# EAGLE board midimixer-channel-before-rearrangement (EAGLE 7.3.0)
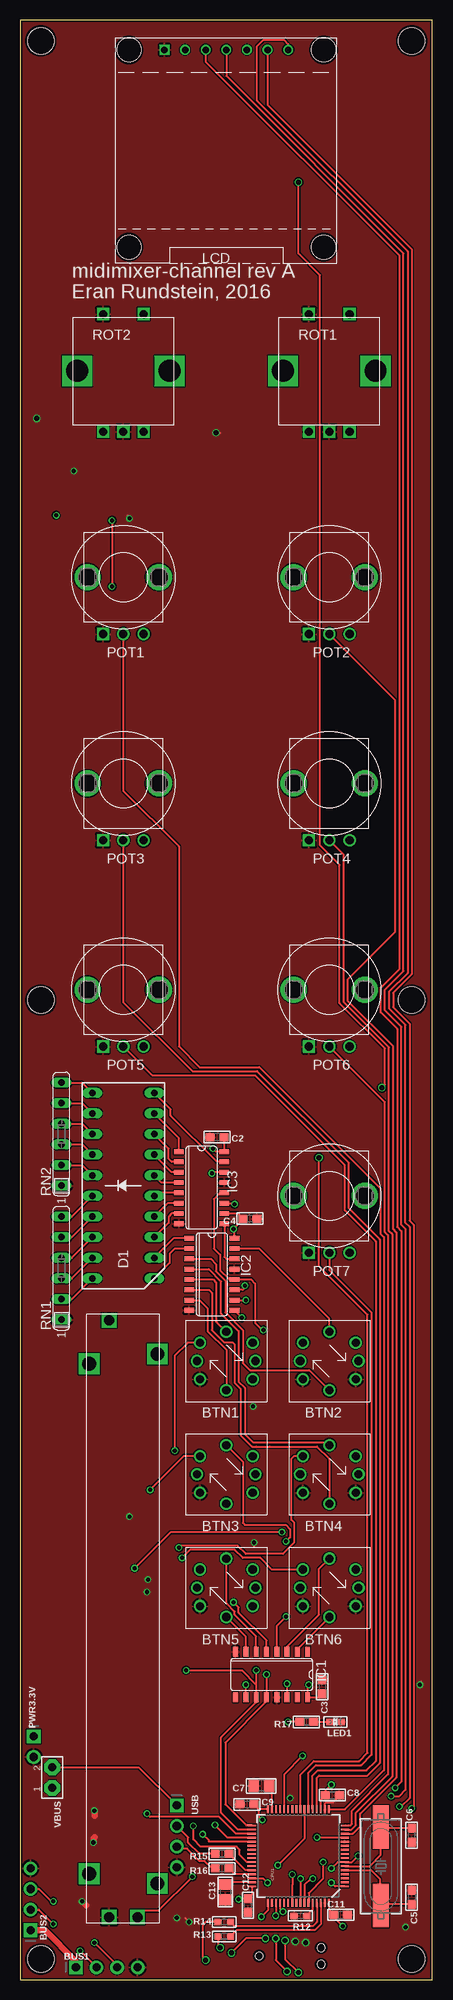
[diagram p0: board, top side]
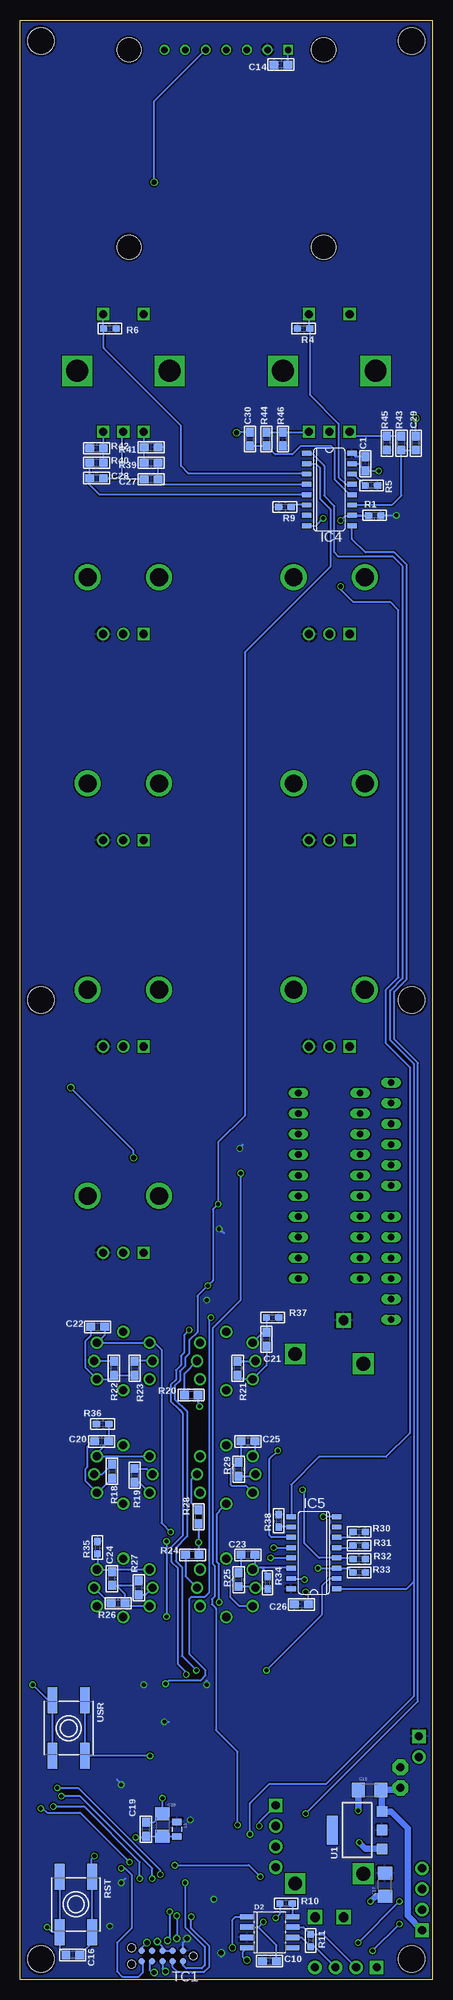
[diagram p1: board, bottom side, seen from below]

Size 50.8 x 241.3 mm. Coordinates in mm from the lower left corner, seen from the top.
Outline: 0,0 50.8,0 50.8,241.3 0,241.3 0,0
Copper layers (1*16): Top 0.035mm / dielectric 1.5mm / Bottom 0.035mm
Design rules "MacroFab_Standard_2_Layer *": minimum track width 6mil, minimum drill 12mil, track to track 6mil, track to pad 6mil, pad to pad 6mil, via to via 6mil, smd to smd 0mil, copper to edge 10mil, drill to drill 10mil, minimum pad ring 6mil, minimum via ring 6mil, stop-mask expansion 2mil, vias tented up to drill 25mil, thermal gap 10mil

## Footprints (pad centres in the part's own frame; a part is rotated, then mirrored left to right if it is on the bottom)
B3W-9000-X2X = drill 1: LED1+ 0,3.6; LED1- 3.6,0; LED2+ 0,-3.6; LED2- -3.6,0; SW1 3.25,-2.25; SW2 -3.25,-2.25; SW3 3.25,2.25; SW4 -3.25,2.25
1X04_ROUND = drill 1 pad 1.676 square: 1 -3.81,0 | drill 1 pad 1.676: 2 -1.27,0; 3 1.27,0; 4 3.81,0
0603 = smd 1.1 x 1: 1 -0.85,0; 2 0.85,0
0805 = smd 1.3 x 1.5: 1 -0.95,0; 2 0.95,0
1206 = smd 1.6 x 1.8: 1 -1.4,0; 2 1.4,0
TQFP64 = smd 0.22 x 1: 1 -3.75,-5.75; 2 -3.25,-5.75; 3 -2.75,-5.75; 4 -2.25,-5.75; 5 -1.75,-5.75; 6 -1.25,-5.75; 7 -0.75,-5.75; 8 -0.25,-5.75; 9 0.25,-5.75; 10 0.75,-5.75; 11 1.25,-5.75; 12 1.75,-5.75; 13 2.25,-5.75; 14 2.75,-5.75; 15 3.25,-5.75; 16 3.75,-5.75; 33 3.75,5.75; 34 3.25,5.75; 35 2.75,5.75; 36 2.25,5.75; 37 1.75,5.75; 38 1.25,5.75; 39 0.75,5.75; 40 0.25,5.75; 41 -0.25,5.75; 42 -0.75,5.75; 43 -1.25,5.75; 44 -1.75,5.75; 45 -2.25,5.75; 46 -2.75,5.75; 47 -3.25,5.75; 48 -3.75,5.75 | smd 1 x 0.22: 17 5.75,-3.75; 18 5.75,-3.25; 19 5.75,-2.75; 20 5.75,-2.25; 21 5.75,-1.75; 22 5.75,-1.25; 23 5.75,-0.75; 24 5.75,-0.25; 25 5.75,0.25; 26 5.75,0.75; 27 5.75,1.25; 28 5.75,1.75; 29 5.75,2.25; 30 5.75,2.75; 31 5.75,3.25; 32 5.75,3.75; 49 -5.75,3.75; 50 -5.75,3.25; 51 -5.75,2.75; 52 -5.75,2.25; 53 -5.75,1.75; 54 -5.75,1.25; 55 -5.75,0.75; 56 -5.75,0.25; 57 -5.75,-0.25; 58 -5.75,-0.75; 59 -5.75,-1.25; 60 -5.75,-1.75; 61 -5.75,-2.25; 62 -5.75,-2.75; 63 -5.75,-3.25; 64 -5.75,-3.75
LED_BARGAPH_10 = drill 0.813 long: 1 -11.43,-3.81; 2 -8.89,-3.81; 3 -6.35,-3.81; 4 -3.81,-3.81; 5 -1.27,-3.81; 6 1.27,-3.81; 7 3.81,-3.81; 8 6.35,-3.81; 9 8.89,-3.81; 10 11.43,-3.81; 11 11.43,3.81; 12 8.89,3.81; 13 6.35,3.81; 14 3.81,3.81; 15 1.27,3.81; 16 -1.27,3.81; 17 -3.81,3.81; 18 -6.35,3.81; 19 -8.89,3.81; 20 -11.43,3.81
SO8 = smd 0.65 x 1.75: 1 -1.905,-2.8; 2 -0.635,-2.8; 3 0.635,-2.8; 4 1.905,-2.8; 5 1.905,2.8; 6 0.635,2.8; 7 -0.635,2.8; 8 -1.905,2.8
PTA6043-2015CPB103 = drill 1.2 square: P1 -36.75,1.75; P2 -36.75,-1.75; P3 36.75,1.75 | drill 1.7 square: P$1 -31.4,4.2; P$2 31.4,4.2; P$3 -32.6,-4.2; P$4 32.6,-4.2
STAND-OFF = hole 3.302: 0,0
SO16 = smd 0.6 x 1.2: 1 -4.445,-2.8; 2 -3.175,-2.8; 3 -1.905,-2.8; 4 -0.635,-2.8; 5 0.635,-2.8; 6 1.905,-2.8; 7 3.175,-2.8; 8 4.445,-2.8; 9 4.445,2.8; 10 3.175,2.8; 11 1.905,2.8; 12 0.635,2.8; 13 -0.635,2.8; 14 -1.905,2.8; 15 -3.175,2.8; 16 -4.445,2.8
0805' = smd 0.8 x 1.2: 1 -0.9,0; 2 0.9,0
SSD1306-7PIN = drill 0.8: CLK -2.54,24.3; CS 7.62,24.3; DC 5.08,24.3; MOSI 0,24.3; RES 2.54,24.3; VCC -5.08,24.3 | drill 0.8 square: GND -7.62,24.3 | hole 3: -12,24.3; 12,24.3; -12,0; 12,0
CHIPLED_0603 = smd 0.8 x 0.8: A 0,-0.75; C 0,0.75
PTV09A-4 = drill 2.2: 4 -4.4,0; 5 4.4,0 | drill 1 square: CCW -2.5,-7 | drill 1: CENTER 0,-7; CW 2.5,-7
1X02_ROUND = drill 1 pad 1.676 square: 1 -1.27,0 | drill 1 pad 1.676: 2 1.27,0
_0603 = smd 0.9 x 0.8: 1 -0.762,0; 2 0.762,0
SIL6 = drill 0.813 long: 1 -6.35,0; 2 -3.81,0; 3 -1.27,0; 4 1.27,0; 5 3.81,0; 6 6.35,0
PEC111-4XXXK-SXXXX = drill 1 square: A -2.5,-7.5; B 2.5,-7.5; C 0,-7.5; S1 -2.5,7; S2 2.5,7 | drill 2.7 square: P$1 -5.7,0; P$2 5.7,0
EVQ-Q2 = smd 3.2 x 1.2: A -3.4,-2; A' 3.4,-2; B -3.4,2; B' 3.4,2
TC2050-IDC-NL = smd 0.787 x 0.787: 1 -2.54,-0.635; 2 -2.54,0.635; 3 -1.27,-0.635; 4 -1.27,0.635; 5 0,-0.635; 6 0,0.635; 7 1.27,-0.635; 8 1.27,0.635; 9 2.54,-0.635; 10 2.54,0.635 | hole 0.991: -3.81,0; 3.81,1.016; 3.81,-1.016
SOT223-R = smd 1.3 x 1.3: 1 -2.3,-3.05; 2 0,-3.05; 3 2.3,-3.05 | smd 3.6 x 1.3: 4 0,3.05
JUMPER2 = drill 1 pad 1.93 octagon: 1 2.54,0; 2 0,0
HC49UP = smd 5.334 x 1.93: 1 -4.826,0; 2 4.826,0

## Placement (x,y rotation side)
BTN1  B3W-9000-RG2N  [B3W-9000-X2X]  25.4,76.2 0 top
BTN2  B3W-9000-RG2N  [B3W-9000-X2X]  38.1,76.2 0 top
BTN3  B3W-9000-RG2N  [B3W-9000-X2X]  25.4,62.23 0 top
BTN4  B3W-9000-RG2N  [B3W-9000-X2X]  38.1,62.23 0 top
BTN5  B3W-9000-RG2N  [B3W-9000-X2X]  25.4,48.26 0 top
BTN6  B3W-9000-RG2N  [B3W-9000-X2X]  38.1,48.26 0 top
BUS1  [1X04_ROUND]  10.67,1.52 0 top
BUS2  [1X04_ROUND]  1.27,9.91 90 top
C1  0.1uF  [0603]  8.26,186.69 90 bottom
C2  0.1uF  [0603]  24.26,103.76 180 top
C3  0.1uF  [0603]  37.21,36.07 270 top
C4  0.1uF  [0603]  28.32,93.73 180 top
C5  18pf  [0603]  48.26,10.16 270 top
C6  18pf  [0603]  48.26,17.78 90 top
C7  2.2uF 810-CGJ4J2X7R1A225K  [0805]  29.72,23.88 180 top
C8  0.1uF  [0603]  38.48,22.73 0 top
C9  0.1uF  [0603]  27.94,21.59 0 top
C10  0.1uF  [0603]  20.07,2.29 0 bottom
C11  0.1uF  [0603]  39.5,8 0 top
C12  0.1uF  [0603]  28.07,9.14 90 top
C13  2.2uF 810-CGJ4J2X7R1A225K  [0805]  25.27,10.79 270 top
C14  0.1uF  [0603]  18.67,235.84 180 bottom
C15  10uF 603-CC206KKX5R7BB106  [1206]  7.75,23.37 0 bottom
C16  0.1uF  [0603]  44.32,3.05 180 bottom
C17  10uF 603-CC206KKX5R7BB106  [1206]  5.84,11.68 90 bottom
C18  10uF 603-CC206KKX5R7BB106  [1206]  33.27,19.05 270 bottom
C19  0.1uF  [0603]  35.31,18.54 90 bottom
C20  0.1uF  [0603]  40.77,66.29 0 bottom
C21  0.1uF  [0603]  20.45,78.87 90 bottom
C22  0.1uF  [0603]  41.27,80.39 0 bottom
C23  0.1uF  [0603]  22.73,52.32 0 bottom
C24  0.1uF  [0603]  39.5,49.4 90 bottom
C25  0.1uF  [0603]  22.73,66.29 0 bottom
C26  0.1uF  [0603]  16.13,46.23 180 bottom
C27  0.01uF  [0603]  34.67,184.78 180 bottom
C28  0.01uF  [0603]  41.4,184.91 0 bottom
C29  0.01uF  [0603]  2.03,189.23 90 bottom
C30  0.01uF  [0603]  22.48,189.74 90 bottom
CPU1  STM32F405RG  [TQFP64]  34.29,15.24 90 top
D1  DC7G3HWA  [LED_BARGAPH_10]  12.7,97.79 90 top
D2  SN65HVD232  [SO8]  20.07,5.84 270 bottom
FADER1  PTA6043-2015CPB103  [PTA6043-2015CPB103]  12.7,44.45 90 top
H1  STAND-OFF  [STAND-OFF]  48.26,2.54 0 top
H2  STAND-OFF  [STAND-OFF]  2.54,238.76 0 top
H3  STAND-OFF  [STAND-OFF]  2.54,2.54 0 top
H4  STAND-OFF  [STAND-OFF]  48.26,238.76 0 top
H5  STAND-OFF  [STAND-OFF]  2.54,120.65 0 top
H6  STAND-OFF  [STAND-OFF]  48.26,120.65 0 top
IC1  74LS595D  [SO16]  30.99,37.59 180 top
IC2  74LS595D  [SO16]  23.62,86.87 270 top
IC3  74LS595D  [SO16]  22.35,97.54 270 top
IC4  74165D  [SO16]  12.7,183.51 270 bottom
IC5  74165D  [SO16]  14.61,52.58 90 bottom
L1  [0805']  31.5,18.54 270 bottom
LCD  SSD1306-7PIN  [SSD1306-7PIN]  25.4,213.36 0 top
LED1  [CHIPLED_0603]  38.86,31.75 270 top
POT1  [PTV09A-4]  12.7,172.72 0 top
POT2  [PTV09A-4]  38.1,172.72 0 top
POT3  [PTV09A-4]  12.7,147.32 0 top
POT4  [PTV09A-4]  38.1,147.32 0 top
POT5  [PTV09A-4]  12.7,121.92 0 top
POT6  [PTV09A-4]  38.1,121.92 0 top
POT7  [PTV09A-4]  38.1,96.52 0 top
PWR3.3V  [1X02_ROUND]  1.65,28.7 270 top
R1  10k  [_0603]  7.11,180.34 0 bottom
R4  10k  [_0603]  15.88,203.33 180 bottom
R5  10k  [_0603]  7.49,184.02 0 bottom
R6  10k  [_0603]  39.75,203.33 0 bottom
R9  10k  [_0603]  18.16,181.36 180 bottom
R10  0  [_0603]  18.03,9.4 180 bottom
R11  120 DNP  [_0603]  14.99,4.83 270 bottom
R12  10k  [_0603]  34.54,7.87 180 top
R13  0  [_0603]  25.15,5.33 0 top
R14  0  [_0603]  25.15,7.11 0 top
R15  22  [0603]  24.89,15.49 180 top
R16  22  [0603]  24.89,13.72 180 top
R17  330  [0603]  35.31,31.75 180 top
R18  330  [0603]  39.5,62.61 270 bottom
R19  330  [0603]  36.7,62.1 270 bottom
R20  330  [0603]  29.72,72.01 0 bottom
R21  330  [0603]  24,75.31 270 bottom
R22  330  [0603]  39.24,75.31 270 bottom
R23  330  [0603]  36.7,75.31 270 bottom
R24  330  [0603]  29.59,52.32 0 bottom
R25  330  [0603]  23.88,49.28 90 bottom
R26  330  [0603]  38.73,46.35 0 bottom
R27  330  [0603]  36.2,48.26 90 bottom
R28  330  [0603]  28.83,57.02 270 bottom
R29  330  [0603]  23.88,62.87 90 bottom
R30  10k  [_0603]  9.02,55.12 0 bottom
R31  10k  [_0603]  9.02,53.47 0 bottom
R32  10k  [_0603]  9.02,51.82 0 bottom
R33  10k  [_0603]  9.02,50.16 0 bottom
R34  10k  [_0603]  20.32,48.9 270 bottom
R35  10k  [_0603]  41.27,53.21 90 bottom
R36  10k  [_0603]  40.64,68.45 180 bottom
R37  10k  [_0603]  19.68,81.53 0 bottom
R38  10k  [_0603]  18.92,56.52 90 bottom
R39  10K  [0603]  34.67,186.82 180 bottom
R40  10K  [0603]  41.4,186.82 0 bottom
R41  10K  [0603]  34.67,188.72 180 bottom
R42  10K  [0603]  41.4,188.59 0 bottom
R43  10K  [0603]  3.81,189.23 90 bottom
R44  10K  [0603]  20.45,189.74 90 bottom
R45  10K  [0603]  5.59,189.23 90 bottom
R46  10K  [0603]  18.41,189.74 90 bottom
RN1  4606X-101-101LF  [SIL6]  5.08,87.63 90 top
RN2  4606X-101-101LF  [SIL6]  5.08,104.14 90 top
ROT1  PEC12R-4225F-S0024  [PEC111-4XXXK-SXXXX]  38.1,198.12 0 top
ROT2  PEC12R-4225F-S0024  [PEC111-4XXXK-SXXXX]  12.7,198.12 0 top
RST  [EVQ-Q2]  43.94,9.27 270 bottom
TC1  TC2050-IDC-NL  [TC2050-IDC-NL]  33.27,2.92 180 bottom
U1  LM1117IMPX-3.3/NOPB  [SOT223-R]  9.27,18.41 90 bottom
USB  [1X04_ROUND]  19.3,17.65 270 top
USR  [EVQ-Q2]  44.83,30.99 270 bottom
VBUS  [JUMPER2]  3.94,26.16 270 top
Y1  8MHz 695-HCM49-8-U  [HC49UP]  44.45,13.97 270 top

## Library data of the parts
BTN1-BTN6 FADER1 LCD POT1-POT7 ROT1 ROT2 = keves
BUS1 BUS2 C1-C14 C16 C19-C30 LED1 PWR3.3V R1 R4-R6 R9-R46 RST U1 USB USR VBUS Y1 = microbuilder
C15 C17 C18 L1 = SparkFun-Passives
CPU1 IC4 IC5 = SparkFun-DigitalIC
D1 = SparkFun-LED
D2 = omc
H1-H6 = SparkFun-Electromechanical
IC1-IC3 = SparkFun-DigitalIC; PROD_ID: IC-07875
RN1 RN2 = resistor-sil; OC_FARNELL: unknown; OC_NEWARK: unknown
TC1 = TagConnect

## Nets
3.3V: C1.2 C2.1 C3.2 C4.2 C8.1 C9.2 C10.1 C11.1 C12.2 C14.2 C17.2 C26.2 CPU1.1 CPU1.19 CPU1.32 CPU1.48 CPU1.64 D2.3 FADER1.P3 IC1.10 IC1.16 IC2.10 IC2.16 IC3.10 IC3.16 IC4.16 IC5.16 L1.1 LCD.VCC POT1.CW POT2.CW POT3.CW POT4.CW POT5.CW POT6.CW POT7.CW PWR3.3V.1 R1.2 R4.2 R5.2 R6.2 R9.2 R17.2 R30.2 R31.2 R32.2 R33.2 R34.2 R35.2 R36.2 R37.2 R38.2 R41.1 R42.1 R45.1 R46.1 TC1.1 U1.2
5.0V: BUS1.1 BUS2.1 C15.2 U1.3 VBUS.1
ADC0: CPU1.14 POT2.CENTER
ADC1: CPU1.15 POT4.CENTER
ADC2: CPU1.16 POT6.CENTER
ADC3: CPU1.17 POT1.CENTER
ADC4: CPU1.20 POT3.CENTER
ADC5: CPU1.21 POT5.CENTER
ADC6: CPU1.22 POT7.CENTER
ADC7: CPU1.23 FADER1.P2
AVDD: C18.2 C19.1 CPU1.13 L1.2
BTN_LED1: BTN2.LED1+ IC2.15
BTN_LED2: BTN2.LED2+ IC2.3
BTN_LED3: BTN1.LED1+ IC2.5
BTN_LED4: BTN1.LED2+ IC2.7
BTN_LED5: BTN4.LED1+ IC2.4
BTN_LED6: BTN6.LED1+ IC1.3
BTN_LED7: BTN5.LED1+ IC1.6
BTN_LED8: BTN5.LED2+ IC1.7
BTN_LED9: BTN4.LED2+ IC2.6
BTN_LED10: BTN6.LED2+ IC1.2
BTN_LED11: BTN3.LED1+ IC1.4
BTN_LED12: BTN3.LED2+ IC1.5
BTN_UNUSED1: IC1.1
BTN_UUSED2: IC1.15
CAN_H: BUS1.2 BUS2.2 D2.7 R11.1
CAN_L: BUS1.3 BUS2.3 D2.6 R11.2
CAN_RX: D2.4 R14.1
CAN_TX: D2.1 R13.1
DIN_1: C29.1 IC4.11 R43.1
DIN_2: C30.1 IC4.12 R44.1
DIN_3: IC4.13 R4.1 ROT2.S2
DIN_4: IC4.14 R5.1
DIN_5: IC4.3 R6.1 ROT1.S2
DIN_6: C27.1 IC4.4 R39.1
DIN_7: C28.1 IC4.5 R40.1
DIN_8: IC4.6 R9.1
DIN_9: BTN1.SW4 C21.2 IC5.11 R37.1
DIN_10: BTN4.SW3 BTN4.SW4 C20.2 IC5.12 R36.1
DIN_11: BTN6.SW3 BTN6.SW4 C24.2 IC5.13 R35.1
DIN_12: BTN5.SW4 C23.2 IC5.14 R34.1
DIN_13: BTN2.SW3 BTN2.SW4 C22.2 IC5.3 R33.1
DIN_14: BTN3.SW4 C25.2 IC5.4 R32.1
DIN_15: IC5.5 R31.1
DIN_16: IC5.6 R30.1
GND: BTN1.SW2 BTN2.SW1 BTN2.SW2 BTN3.SW2 BTN4.SW1 BTN4.SW2 BTN5.SW2 BTN6.SW1 BTN6.SW2 BUS1.4 BUS2.4 C1.1 C2.2 C3.1 C4.1 C5.1 C6.1 C7.2 C8.2 C9.1 C10.2 C11.2 C12.1 C13.2 C14.1 C15.1 C16.2 C17.1 C18.1 C19.2 C20.1 C21.1 C22.1 C23.1 C24.1 C25.1 C26.1 C27.2 C28.2 C29.2 C30.2 CPU1.12 CPU1.18 CPU1.63 D2.2 FADER1.P1 IC1.8 IC1.13 IC2.8 IC2.13 IC3.8 IC3.13 IC4.8 IC4.15 IC5.8 IC5.15 LCD.GND LED1.C POT1.CCW POT2.CCW POT3.CCW POT4.CCW POT5.CCW POT6.CCW POT7.CCW PWR3.3V.2 R10.2 R12.2 R18.2 R19.2 R20.2 R21.2 R22.2 R23.2 R24.2 R25.2 R26.2 R27.2 R28.2 R29.2 RN1.1 RN2.1 ROT1.C ROT1.S1 ROT2.C ROT2.S1 RST.A RST.A' TC1.3 TC1.5 TC1.9 U1.1 USB.4 USR.A USR.A'
LCD_CLK: CPU1.55 LCD.CLK
LCD_CS: CPU1.58 LCD.CS
LCD_DC: CPU1.59 LCD.DC
LCD_MISO_UNUSED: CPU1.56
LCD_MOSI: CPU1.57 LCD.MOSI
LCD_RST: CPU1.24 LCD.RES
N$1: C6.2 CPU1.6 Y1.1
N$2: C5.2 CPU1.5 Y1.2
N$3: C13.1 CPU1.47
N$4: C7.1 CPU1.31
N$5: LED1.A R17.1
N$6: CPU1.60 R12.1
N$7: R15.2 USB.2
N$8: R16.2 USB.3
N$9: BTN4.LED1- R18.1
N$10: BTN4.LED2- R19.1
N$11: D1.2 IC2.1
N$12: IC1.14 IC2.9
N$13: CPU1.62 R13.2
N$14: D1.20 RN1.2
N$15: D1.19 RN1.3
N$16: D1.18 RN1.4
N$17: D1.17 RN1.5
N$18: D1.16 RN1.6
N$19: D1.15 RN2.2
N$20: D1.14 RN2.3
N$21: D1.13 RN2.4
N$22: D1.12 RN2.5
N$23: D1.11 RN2.6
N$24: BTN1.LED1- R20.1
N$25: BTN1.LED2- R21.1
N$26: IC5.10 R38.1
N$27: CPU1.61 R14.2
N$28: IC4.10 IC5.9 R1.1
N$29: BTN5.LED1- R24.1
N$30: BTN5.LED2- R25.1
N$31: D1.1 IC2.2
N$32: R40.2 R42.2 ROT1.B
N$33: R39.2 R41.2 ROT1.A
N$34: BTN6.LED1- R26.1
N$35: BTN6.LED2- R27.1
N$36: R44.2 R46.2 ROT2.B
N$37: R43.2 R45.2 ROT2.A
N$39: BTN2.LED1- R22.1
N$40: BTN2.LED2- R23.1
N$44: BTN3.LED1- R28.1
N$45: BTN3.LED2- R29.1
N$49: D1.10 IC3.15
N$50: D1.9 IC3.1
N$51: D1.8 IC3.2
N$52: D1.7 IC3.3
N$53: D1.6 IC3.4
N$54: D1.5 IC3.5
N$55: D1.4 IC3.6
N$56: D1.3 IC3.7
N$57: IC2.14 IC3.9
N$73: D2.8 R10.1
NRST: C16.1 CPU1.7 RST.B RST.B' TC1.10
PB2: CPU1.28 USR.B USR.B'
SPI2_CLK: CPU1.34 IC1.11 IC2.11 IC3.11 IC4.2 IC5.2
SPI2_MISO: CPU1.35 IC4.9
SPI2_MOSI: CPU1.36 IC3.14
SPI2_RC1: CPU1.33 IC1.12 IC2.12 IC3.12
SPI2_RC2: CPU1.37 IC4.1 IC5.1
SWCK: CPU1.49 TC1.4
SWDIO: CPU1.46 TC1.2
UART_RX: CPU1.52 TC1.8
UART_TX: CPU1.51 TC1.6
USB_DM: CPU1.44 R15.1
USB_DP: CPU1.45 R16.1
USB_VBUS: CPU1.42 USB.1 VBUS.2

## Tracks (layer width: path | path; a pad name or v marks a point on that pad's centre or on a via)
3.3V  (via drill 0.51, 0.6)
  Top 0.254: C2.1 25.15,103.71 IC3.16 24.13,101.98 v23.75,102.36 | C3.2 36.78,34.79 IC1.16 35.43,36.2 v35.56,36.32 | IC1.10 v27.81,36.32 | IC3.10 26.84,94.36 C4.2 27.47,93.64 v26.29,92.46 26.42,92.32 IC2.16 | IC2.10 v27.81,83.69 | CPU1.19 37.04,22.14 C8.1 37.63,23.28 v38.35,24 | CPU1.32 29.39,20.99 | 29.39,20.99 C9.2 | 29.39,20.99 29.39,20.14 v29.84,19.68 | v26.92,9.91 27.01,9.99 C12.2 28.54,10.47 CPU1.48 | CPU1.64 38.04,8.61 C11.1 38.65,7.71 v39.75,6.6 | CPU1.1 38.8,11.49 v38.35,11.94 | R17.2 v33.02,31.75 | v30.23,5.08 27.81,5.08 v26.04,3.3
  Bottom 0.254: v26.29,92.46 26.29,92.33 26.16,92.2 25.91,92.2 25.65,91.95 | v23.75,102.36 23.75,102.49 23.37,102.87 | v35.56,36.32 35.81,36.58 | v27.81,36.32 27.81,36.83 | v27.81,83.69 27.94,83.69 | C1.2 9.48,187.54 IC4.16 | R1.2 v4.45,180.34 | v38.35,24 38.35,24.13 38.86,24.64 | v29.84,19.68 30.1,19.43 | v26.92,9.91 26.8,9.91 26.67,9.78 | v38.35,11.94 37.85,12.45 | v33.02,31.75 32.51,31.75 | TC1.1 30.73,4.57 v30.23,5.08 | v26.04,3.3 26.04,2.79
  pour Bottom: -6.86,241.3 -6.86,-0.89 49.91,-1.14 54.99,8.89 54.86,242.7
5.0V
  Top 0.813: BUS2.1 3.05,6.1 6.86,2.29 BUS1.1
  Bottom 0.813: BUS2.1 3.05,7.87 3.05,18.67 5.08,20.7 6.21,20.7 U1.3 6.22,23.24 C15.2 4.19,23.37 VBUS.1
ADC0
  Top 0.254: CPU1.14 40.98,17.99 41.91,18.92 41.91,20.45 46.35,24.89 46.35,92.08 45.97,92.46 45.97,114.94 40.39,120.52 40.39,123.19 46.23,129.03 46.23,157.59 POT2.CENTER
ADC1
  Top 0.254: CPU1.15 40.84,18.49 41.4,19.05 41.4,20.57 45.85,25.02 45.85,91.82 45.47,92.2 45.47,114.81 39.88,120.4 39.88,138.54 POT4.CENTER
ADC2
  Top 0.254: CPU1.16 40.71,18.99 40.89,19.18 40.89,20.83 45.34,25.27 45.34,91.69 44.96,92.08 44.96,108.06 POT6.CENTER
ADC3
  Top 0.254: CPU1.17 40.04,20.99 44.83,25.78 44.83,91.44 44.45,91.82 44.45,97.41 29.46,112.39 22.1,112.39 19.56,114.94 19.56,139.57 12.7,146.43 POT1.CENTER
ADC4
  Top 0.254: CPU1.20 36.54,24.86 36.83,25.15 42.8,25.15 44.32,26.67 44.32,91.19 40.51,95 40.51,100.58 29.21,111.89 21.21,111.89 12.7,120.4 POT3.CENTER
ADC5
  Top 0.254: CPU1.21 36.04,25.12 36.7,25.78 42.67,25.78 43.81,26.92 43.81,90.93 40.01,94.74 40.01,100.33 28.96,111.38 16.26,111.38 12.71,114.92 POT5.CENTER
ADC6
  Top 0.254: CPU1.22 35.54,25.51 36.45,26.42 42.04,26.42 43.31,27.69 43.31,82.17 38.1,87.38 POT7.CENTER
ADC7  (via drill 0.51)
  Top 0.254: CPU1.23 35.04,17.39 v31.75,14.1 | v21.21,12.7 17.02,8.51 15.26,8.51 FADER1.P2
  Bottom 0.254: v31.75,14.1 22.61,14.1 v21.21,12.7
AVDD  (via drill 0.51)
  Top 0.254: CPU1.13 36.61,17.49 v36.58,17.53
  Bottom 0.254: v36.58,17.53 35.47,17.53 C19.1 33.32,17.69 C18.2 L1.2
BTN_LED1
  Top 0.254: BTN2.LED1+ 38.1,81.41 29.46,90.04 IC2.15
BTN_LED2
  Top 0.254: BTN2.LED2+ 35.64,75.06 28.32,75.06 27.43,75.95 27.43,80.01 25.27,82.17 25.27,86.11 24.13,87.25 24.13,88.14 23.5,88.77 IC2.3
BTN_LED3
  Top 0.254: IC2.5 23.75,86.23 24.13,85.85 24.13,81.07 24.28,80.92 BTN1.LED1+
BTN_LED4
  Top 0.254: IC2.7 22.1,83.69 23.11,82.68 23.11,79.88 25.4,77.6 BTN1.LED2+
BTN_LED5
  Top 0.254: BTN4.LED1+ 37.76,66.17 28.7,66.17 27.69,67.18 27.69,72.9 26.92,73.66 26.92,79.88 24.77,82.04 24.77,85.98 23.24,87.5 IC2.4
BTN_LED6
  Top 0.254: IC1.3 32.89,41.02 36.83,44.96 36.83,50.59 BTN6.LED1+
BTN_LED7
  Top 0.254: IC1.6 29.08,42.29 26.42,44.96 26.42,45.34 25.4,46.35 BTN5.LED1+
BTN_LED8
  Top 0.254: IC1.7 27.81,42.25 BTN5.LED2+
BTN_LED9
  Top 0.254: IC2.6 23.24,84.96 23.62,84.58 23.62,80.01 25.15,78.49 26.16,78.49 26.42,78.23 26.42,73.53 27.18,72.77 27.18,67.06 28.57,65.66 29.08,65.66 30.73,65.66 36.58,65.66 38.1,64.14 BTN4.LED2+
BTN_LED10
  Top 0.254: IC1.2 34.16,40.72 BTN6.LED2+
BTN_LED11  (via drill 0.51)
  Top 0.254: BTN3.LED1+ 27.43,63.8 27.43,56.26 27.69,56.01 32.77,56.01 33.27,55.5 33.27,54.48 v32.77,53.98 | IC1.4 31.62,43.56 v32.77,44.7
  Bottom 0.254: v32.77,53.98 v32.77,44.7
BTN_LED12  (via drill 0.51)
  Top 0.254: IC1.5 30.35,41.78 26.92,45.21 26.92,45.85 v26.29,46.48
  Bottom 0.254: BTN3.LED2+ 26.29,57.74 26.29,57.66 26.54,57.4 26.54,51.44 26.29,51.18 v26.29,46.48
CAN_H  (via drill 0.51)
  Top 0.254: BUS2.2 2.29,8.64 v4.06,6.86 | BUS1.2 v7.37,3.56
  Bottom 0.254: D2.7 15.88,6.48 R11.1 13.46,5.59 BUS1.2 | v7.37,3.56 v4.06,6.86
CAN_L  (via drill 0.51)
  Top 0.254: BUS2.3 2.29,11.18 3.81,9.65 v4.06,9.65 | BUS1.3 11.94,1.78 v9.14,4.57
  Bottom 0.254: D2.6 16.13,5.21 R11.2 14.48,4.06 BUS1.3 | v9.14,4.57 v4.06,9.65
CAN_RX  (via drill 0.6)
  Top 0.254: R14.1 22.86,7.11 22.48,6.73 22.48,2.79 v22.86,2.41
  Bottom 0.254: v22.86,2.41 22.99,2.41 23.37,2.79 23.37,3.44 D2.4
CAN_TX  (via drill 0.6)
  Top 0.254: R13.1 24.38,4.19 v24.64,3.94
  Bottom 0.254: v24.64,3.94 24.64,7.37 24.26,7.75 D2.1
DIN_1
  Bottom 0.254: IC4.11 4.95,181.61 3.81,182.75 R43.1 C29.1
DIN_2
  Bottom 0.254: IC4.12 10.16,182.88 12.06,184.78 12.06,188.47 12.45,188.85 16.26,188.85 17.27,187.83 19.39,187.83 R44.1 C30.1
DIN_3
  Bottom 0.254: IC4.13 10.67,184.15 11.56,185.04 11.56,191.64 15.11,195.2 R4.1 15.2,203.41 ROT2.S2
DIN_4
  Bottom 0.254: IC4.14 9.65,185.42 R5.1
DIN_5
  Bottom 0.254: IC4.3 15.63,185.55 30.1,185.55 30.99,186.44 30.99,191.39 40.51,200.91 R6.1 40.55,203.37 40.6,203.37 ROT1.S2
DIN_6
  Bottom 0.254: IC4.4 33.19,184.15 C27.1 R39.1
DIN_7
  Bottom 0.254: IC4.5 41.02,182.88 42.29,184.15 42.29,184.87 C28.1 R40.1
DIN_8
  Bottom 0.254: IC4.6 17.14,181.61 R9.1
DIN_9  (via drill 0.51)
  Top 0.254: BTN1.SW4 20.66,78.45 19.05,76.83 v19.05,65.15
  Bottom 0.254: BTN1.SW4 20.88,79.72 C21.2 R37.1 | IC5.11 19.81,54.48 20.07,54.74 20.07,64.14 v19.05,65.15
DIN_10  (via drill 0.51)
  Top 0.254: BTN4.SW4 33.75,64.48 33.4,64.14 33.4,56.64 33.78,56.26 33.78,53.85 32.38,52.45 27.81,52.45 26.8,53.47 19.81,53.47 v19.56,53.21
  Bottom 0.254: BTN4.SW4 BTN4.SW3 41.35,64.86 C20.2 39.88,66.33 R36.1 | v19.56,53.21 IC5.12
DIN_11  (via drill 0.51)
  Top 0.254: BTN6.SW4 31.02,50.51 29.59,51.94 27.43,51.94 26.42,52.96 20.95,52.96 v19.94,51.94
  Bottom 0.254: BTN6.SW4 39.24,50.51 C24.2 39.75,50.51 BTN6.SW3 41.27,50.59 R35.1 | v19.94,51.94 IC5.13
DIN_12
  Bottom 0.254: C23.2 21.88,50.78 | 21.88,50.78 BTN5.SW4 | 21.88,50.78 21.08,50.78 | 21.08,50.78 17.51,50.78 IC5.14 | R34.1 20.32,50.02 21.08,50.78
DIN_13  (via drill 0.51)
  Top 0.254: v32.26,55.12 18.54,55.12 v14.1,50.67
  Bottom 0.254: C22.2 40.42,79.38 BTN2.SW3 BTN2.SW4 34.25,78.45 33.4,77.6 33.4,56.26 v32.26,55.12 | v14.1,50.67 IC5.3 10.29,50.67 R33.1
DIN_14  (via drill 0.51)
  Top 0.254: v16,60.33 20.19,64.52 22.11,64.52 BTN3.SW4
  Bottom 0.254: C25.2 21.88,64.75 BTN3.SW4 | v16,60.33 15.75,60.07 15.75,53.72 13.97,51.94 IC5.4 9.91,51.94 R32.1
DIN_15
  Bottom 0.254: IC5.5 10.03,53.21 R31.1
DIN_16
  Bottom 0.254: IC5.6 10.41,54.48 R30.1
GND  (via drill 0.51, 0.6)
  Top 0.254: v28.7,70.61 28.57,70.61 28.45,70.48 | v28.83,53.85 28.83,53.34 | v13.46,179.96 13.46,180.09 13.21,180.34 | CPU1.18 37.54,21.66 37.72,21.84 38.57,21.84 39.33,22.61 C8.2 | v20.83,7.11 20.32,7.62 | v19.3,7.62 19.56,7.37 | v33.27,22.35 33.27,22.61 | v49.28,36.32 49.28,36.58 49.4,36.7 | v47.5,6.48 47.75,6.73 | v6.6,185.8 6.48,185.8 | v15.75,49.28 15.75,49.15 15.62,49.02 | v15.62,47.75 15.62,47.88 15.75,48.01 | v13.46,57.02 13.46,57.4 | v24.13,190.5 24.64,190.5 | v2.03,192.28 2.03,192.66
  Top 0.813: v7.62,9.65 8.13,9.14 | v9.14,20.83 9.14,20.19 | v9.02,16.89 9.02,17.4 9.14,17.53
  Bottom 0.254: R23.2 R22.2 39.75,73.95 BTN2.SW1 42.8,75.4 42.8,78.61 42.12,79.29 C22.1 | R21.2 23.49,73.95 BTN1.SW2 20.45,75.65 C21.1 | R20.2 28.87,70.78 v28.7,70.61 | R18.2 41.28,59.98 BTN4.SW1 42.8,61.43 42.8,62.87 42.55,63.12 42.55,65.66 41.91,66.29 C20.1 | R19.2 36.12,61.25 BTN4.SW2 | R28.2 v28.83,53.85 28.74,53.76 R24.2 | C25.1 23.58,64.01 R29.2 24.04,63.72 24.89,62.87 24.89,60.96 24.77,60.83 23,60.83 BTN3.SW2 | C23.1 23.58,50.42 R25.2 24.89,49.11 24.89,47.12 23.79,46.01 BTN5.SW2 | C24.1 38.99,48.55 | 38.99,48.55 36.75,48.55 R27.2 | 38.99,48.55 37.88,47.45 R26.2 37.54,46.01 BTN6.SW2 | C1.1 9.11,186.69 IC4.15 9.14,186.69 8.26,185.8 v6.6,185.8 | IC4.8 14.35,179.07 v13.46,179.96 | D2.2 21.46,6.48 | 21.46,6.48 v20.83,7.11 | R10.2 18.8,8.13 v19.3,7.62 | C10.2 19.22,4.23 21.46,6.48 | C19.2 34.33,19.39 C18.1 v33.27,22.35 | USR.A' USR.A 47.34,34.39 v49.28,36.32 | RST.A RST.A' | RST.A' 46.89,5.87 v47.5,6.48 | RST.A' 45.94,3.82 C16.2 | IC5.15 15.88,49.4 v15.75,49.28 | C26.1 15.28,47.41 v15.62,47.75 | IC5.8 v13.46,57.02 | C14.1 17.82,237.62 LCD.GND | TC1.3 TC1.5 33.27,4.06 v33.91,4.7 | TC1.9 35.81,3.94 v35.18,4.57 | C27.2 37.47,184.78 38.23,185.55 | 38.23,185.55 38.23,190.49 ROT1.C | C28.2 38.86,184.91 38.23,185.55 | C30.2 24.04,190.59 v24.13,190.5 | C29.2 v2.03,192.28
  Bottom 0.813: C17.1 6.99,10.28 v7.62,9.65 | C15.1 v9.15,20.83 v9.14,20.83 | U1.1 8.24,16.11 v9.02,16.89
  pour Top: -9.4,243.46 -9.02,-1.4 50.29,-1.52 56.77,8.13 56.52,242.82
LCD_CLK  (via drill 0.51)
  Top 0.254: v33.53,12.95 33.53,11.68 33.54,11.67 CPU1.55 | v46.23,23.62 46.99,24.38 46.99,92.2 46.48,92.71 46.48,117.09 44.45,119.13 44.45,122.17 46.74,124.46 46.74,212.34 22.86,236.22 LCD.CLK
  Bottom 0.254: v46.23,23.62 43.69,23.62 33.53,13.46 v33.53,12.95
LCD_CS  (via drill 0.51)
  Top 0.254: v36.07,12.45 35.81,12.45 35.05,11.68 35.05,9.5 CPU1.58 | v46.74,21.34 46.99,21.34 48.01,22.35 48.01,92.71 47.5,93.22 47.5,117.6 45.47,119.63 45.47,121.67 47.75,123.95 47.75,212.85 29.21,231.39 29.21,238.12 29.97,238.89 32.51,238.89 33.02,238.38 LCD.CS
  Bottom 0.254: v46.74,21.34 42.93,21.34 36.07,14.48 v36.07,12.45
LCD_DC  (via drill 0.51)
  Top 0.254: v48.26,21.08 48.51,21.34 48.51,92.96 48.01,93.47 48.01,117.73 45.97,119.76 45.97,121.54 48.26,123.83 48.26,213.11 30.48,230.89 LCD.DC | v37.34,14.48 37.34,12.45 35.56,10.67 35.56,9.51 CPU1.59
  Bottom 0.254: v48.26,21.08 48.01,21.08 47.5,20.57 43.43,20.57 v37.34,14.48
LCD_MOSI  (via drill 0.51)
  Top 0.254: v34.54,12.45 CPU1.57 | v45.72,22.61 46.74,22.61 47.5,23.37 47.5,92.46 46.99,92.96 46.99,117.35 44.96,119.38 44.96,121.92 47.24,124.21 47.24,212.6 25.4,234.44 LCD.MOSI
  Bottom 0.254: v34.54,12.45 34.54,13.72 43.43,22.61 v45.72,22.61
LCD_RST  (via drill 0.6)
  Top 0.254: CPU1.24 34.54,25.27 36.2,26.92 41.78,26.92 42.8,27.94 42.8,81.92 36.83,87.88 v36.83,101.22 | v44.58,109.86 44.96,110.24 44.96,114.68 39.37,120.27 39.37,137.29 36.96,139.7 36.96,209.93 34.29,212.6 v34.29,221.36
  Bottom 0.254: v36.83,101.22 36.83,102.11 v44.58,109.86 | LCD.RES 34.29,231.31 v34.29,221.36
N$1
  Top 0.254: CPU1.6 43.07,13.99 44.45,15.37 Y1.1 44.62,18.63 C6.2
N$2
  Top 0.254: CPU1.5 43.28,13.49 44.32,12.45 44.32,11.18 44.45,11.05 44.45,10.79 44.7,10.54 44.7,9.4 Y1.2 44.62,9.31 C5.2
N$3
  Top 0.254: CPU1.47 25.52,11.99 C13.1
N$4
  Top 0.254: CPU1.31 31.04,23.5 C7.1
N$5
  Top 0.254: R17.1 LED1.A
N$6
  Top 0.254: CPU1.60 36.04,8.61 R12.1
N$7
  Top 0.254: R15.2 22.1,15.49 20.7,16.89 20.7,17.53 USB.2
N$8
  Top 0.254: R16.2 23.62,13.72 22.73,14.61 22.1,14.61 20.57,16.13 19.56,16.13 USB.3
N$9
  Bottom 0.254: BTN4.LED1- 40.73,62.23 R18.1
N$10
  Bottom 0.254: R19.1 35.22,62.95 BTN4.LED2-
N$11
  Top 0.254: IC2.1 18.92,91.31 D1.2
N$12  (via drill 0.51)
  Top 0.254: IC2.9 v27.3,81.53 | v32.89,36.45 IC1.14
  Bottom 0.254: v32.89,36.45 32.51,36.83 28.57,36.83 27.94,37.47 27.94,38.1 29.97,40.13 29.97,46.86 29.72,47.12 28.07,47.12 27.56,47.62 27.56,81.28 v27.3,81.53
N$13
  Top 0.254: CPU1.62 37.04,6.81 36.32,6.1 26.67,6.1 R13.2
N$14
  Top 0.254: RN1.2 6.35,83.82 D1.20
N$15
  Top 0.254: RN1.3 6.35,86.36 D1.19
N$16
  Top 0.254: RN1.4 6.35,88.9 D1.18
N$17
  Top 0.254: RN1.5 6.35,91.44 D1.17
N$18
  Top 0.254: RN1.6 6.35,93.98 D1.16
N$19
  Top 0.254: RN2.2 7.62,100.33 D1.15
N$20
  Top 0.254: RN2.3 7.62,102.87 D1.14
N$21
  Top 0.254: RN2.4 7.62,105.41 D1.13
N$22
  Top 0.254: RN2.5 7.62,107.95 D1.12
N$23
  Top 0.254: RN2.6 7.62,110.49 D1.11
N$24
  Bottom 0.254: R20.1 30.57,74.63 BTN1.LED1-
N$25
  Bottom 0.254: R21.1 21.84,76.16 BTN1.LED2-
N$26
  Bottom 0.254: IC5.10 R38.1
N$27
  Top 0.254: CPU1.61 36.54,7.08 36.07,6.6 26.42,6.6 R14.2
N$28  (via drill 0.51)
  Top 0.254: v11.3,179.71 v11.3,171.58
  Bottom 0.254: R1.1 IC4.10 8.13,180.34 8,180.21 10.79,180.21 v11.3,179.71 | IC5.9 17.4,60.96 13.97,64.39 5.71,64.39 2.79,67.31 2.79,112.39 5.71,115.32 5.71,121.92 4.19,123.44 4.19,168.66 5.21,169.67 9.78,169.67 11.3,171.2 v11.3,171.58
N$29
  Bottom 0.254: R24.1 30.44,49.7 BTN5.LED1-
N$30
  Bottom 0.254: R25.1 21.97,48.43 BTN5.LED2-
N$31
  Top 0.254: IC2.2 19.05,90.04 18.41,89.41 18.41,88.27 D1.1
N$32
  Bottom 0.254: R40.2 R42.2 40.55,190.57 ROT1.B
N$33
  Bottom 0.254: R39.2 R41.2 35.52,190.54 ROT1.A
N$34
  Bottom 0.254: R26.1 39.8,46.35 BTN6.LED1-
N$35
  Bottom 0.254: R27.1 35.35,47.41 BTN6.LED2-
N$36
  Bottom 0.254: R44.2 R46.2 15.23,190.59 ROT2.B
N$37
  Bottom 0.254: R43.2 R45.2 9.66,190.08 ROT2.A
N$39
  Bottom 0.254: BTN2.LED1- 39.28,76.2 R22.1
N$40
  Bottom 0.254: BTN2.LED2- 36.66,76.2 R23.1
N$44
  Bottom 0.254: BTN3.LED1- 29.08,62.23 29.72,61.59 29.72,58.76 R28.1
N$45
  Bottom 0.254: R29.1 22.02,62.02 BTN3.LED2-
N$49
  Top 0.254: IC3.15 24.26,100.71 18.54,106.43 18.54,107.19 D1.10
N$50
  Top 0.254: IC3.1 19.55,103.64 D1.9
N$51
  Top 0.254: IC3.2 18.67,100.71 18.29,101.09 18.29,102.36 D1.8
N$52
  Top 0.254: IC3.3 18.67,99.44 D1.7
N$53
  Top 0.254: IC3.4 17.4,98.17 D1.6
N$54
  Top 0.254: IC3.5 16.89,96.9 D1.5
N$55
  Top 0.254: IC3.6 18.16,95.63 D1.4
N$56
  Top 0.254: IC3.7 18.67,94.36 18.29,93.98 18.29,93.22 D1.3
N$57
  Top 0.254: IC3.9 25.15,89.02 25.4,88.77 IC2.14
N$73
  Bottom 0.254: R10.1 D2.8
NRST  (via drill 0.51)
  Top 0.254: v38.35,13.72 39.13,14.49 CPU1.7 40.91,14.49 v41.66,15.24
  Bottom 0.254: v38.35,13.72 37.85,13.72 37.08,12.95 37.08,6.35 38.86,4.57 38.86,1.02 38.23,0.38 36.2,0.38 35.69,0.89 35.69,2.16 TC1.10 | v41.66,15.24 42.04,14.86 42.04,12.77 RST.B RST.B' 41.94,4.58 C16.1
PB2  (via drill 0.51)
  Top 0.254: CPU1.28 32.54,25.3 v34.8,27.56
  Bottom 0.254: v34.8,27.56 42.8,27.56 USR.B' USR.B
SPI2_CLK  (via drill 0.51)
  Top 0.254: IC3.11 26.29,95.63 v26.42,95.5 | v27.69,85.47 27.69,85.22 27.43,84.96 IC2.11 | v29.08,38.1 29.08,36.32 | 29.08,36.32 IC1.11 29.08,34.16 24.77,29.84 24.77,20.57 26.85,18.49 CPU1.34 | v20.45,38.1 27.3,38.1 29.08,36.32
  Bottom 0.254: v29.08,38.1 30.86,39.88 30.86,50.8 31.62,51.56 31.62,53.21 30.23,54.61 30.23,69.98 31.75,71.5 31.75,73.15 31.11,73.79 31.11,74.93 30.48,75.56 30.48,76.58 29.97,77.09 29.97,78.74 28.96,79.76 28.96,84.2 v27.69,85.47 27.05,86.11 27.05,94.87 v26.42,95.5 26.42,103.12 23.11,106.43 23.11,163.45 12.57,173.99 12.57,181.1 13.84,182.37 13.84,186.18 14.35,186.69 IC4.2 | IC5.2 12.7,49.4 13.59,48.51 13.59,44.96 v20.45,38.1
SPI2_MISO  (via drill 0.51)
  Top 0.254: CPU1.35 26.59,17.99 24.51,20.07 16,20.07 v15.62,20.45
  Bottom 0.254: v15.62,20.45 1.78,34.29 1.78,112.9 4.7,115.82 4.7,121.67 3.17,123.19 3.17,174.24 4.7,175.77 8.26,175.77 9.91,177.42 IC4.9
SPI2_MOSI  (via drill 0.51)
  Top 0.254: IC3.14 23.75,99.44 v23.62,99.31 | CPU1.36 25.56,17.49 v24,19.05
  Bottom 0.254: v23.62,99.31 23.62,83.69 27.05,80.26 27.05,51.18 26.8,50.93 26.8,47.24 27.18,46.86 27.18,46.23 26.67,45.72 26.67,30.73 24,28.07 v24,19.05
SPI2_RC1  (via drill 0.51)
  Top 0.254: IC3.12 24.64,96.9 23.88,96.14 23.88,90.04 24.64,89.28 24.64,87.38 25.78,86.23 IC2.12 28.45,86.23 28.96,85.72 28.96,80.9 29.84,80.01 v29.97,80.01 | v30.35,37.59 IC1.12 30.35,34.29 25.27,29.21 25.27,21.59 27.87,18.99 CPU1.33
  Bottom 0.254: v30.35,37.59 30.35,37.85 31.37,38.86 31.37,50.67 32.13,51.44 32.13,53.34 30.73,54.74 30.73,69.72 30.86,69.85 31.18,70.17 32.26,71.25 32.26,73.28 31.62,73.91 31.62,75.06 30.99,75.69 30.99,76.83 30.61,77.22 30.61,79.38 v29.97,80.01
SPI2_RC2  (via drill 0.51)
  Top 0.254: CPU1.37 23.27,16.99 23.24,17.02 23.24,17.14 v22.48,17.91
  Bottom 0.254: IC4.1 14.86,187.96 13.34,186.44 13.34,182.75 12.06,181.48 12.06,175.77 11.56,175.26 4.83,175.26 3.68,174.12 3.68,123.32 5.21,121.79 5.21,115.7 2.29,112.78 2.29,49.02 | v22.48,17.91 22.48,21.72 20.07,24.13 13.08,24.13 2.29,34.92 2.29,49.02 | IC5.1 3.17,48.13 2.29,49.02
SWCK  (via drill 0.51)
  Top 0.254: CPU1.49 30.54,8.57 v29.72,7.75
  Bottom 0.254: TC1.4 32,1.52 31.37,0.89 28.19,0.89 27.56,1.52 27.56,4.19 29.72,6.35 v29.72,7.75
SWDIO  (via drill 0.51)
  Top 0.254: CPU1.46 29.93,12.49 v30.48,11.94
  Bottom 0.254: TC1.2 30.73,1.78 30.35,1.4 28.45,1.4 28.07,1.78 28.07,4.06 30.48,6.48 v30.48,11.94
UART_RX  (via drill 0.51, 0.6)
  Top 0.254: CPU1.52 32.04,8.73 v32.38,8.38 | v32.64,4.83 32.64,2.54 v34.29,0.89
  Bottom 0.254: v32.38,8.38 32.38,5.08 v32.64,4.83 | v34.29,0.89 34.54,0.89 34.8,1.14 34.8,2.03 TC1.8
UART_TX  (via drill 0.51, 0.6)
  Top 0.254: CPU1.51 31.54,7.92 v31.5,7.87 | v31.5,5.08 31.5,2.41 v32.89,1.02
  Bottom 0.254: v31.5,7.87 v31.5,5.08 | 32.64,1.02 v32.89,1.02 33.27,1.4 TC1.6
USB_DM
  Top 0.254: CPU1.44 27.75,13.49 R15.1
USB_DP
  Top 0.254: CPU1.45 26.47,12.99 R16.1
USB_VBUS  (via drill 0.51)
  Top 0.254: CPU1.42 27.93,14.49 27.05,15.37 27.05,16 26.67,16.38 22.23,16.38 21.34,17.27 v21.34,18.92 | VBUS.2 14.61,26.16 USB.1
  Bottom 0.254: v21.34,18.92 21.34,19.43 USB.1

## Text on the board
tNames: midimixer-channel rev A | Eran Rundstein, 2016